# Altium PCB roneCPUBoard-v11.PcbDoc (part 3 of 3)
Units mil, origin at the board's own origin, x right, y up, seen from the top; angles counter-clockwise.
Board outline 3915.41 x 3915.49 mil, 2 copper layers (Top Layer, Bottom Layer); 202 components, 158 nets, 750 pads, 439 vias.
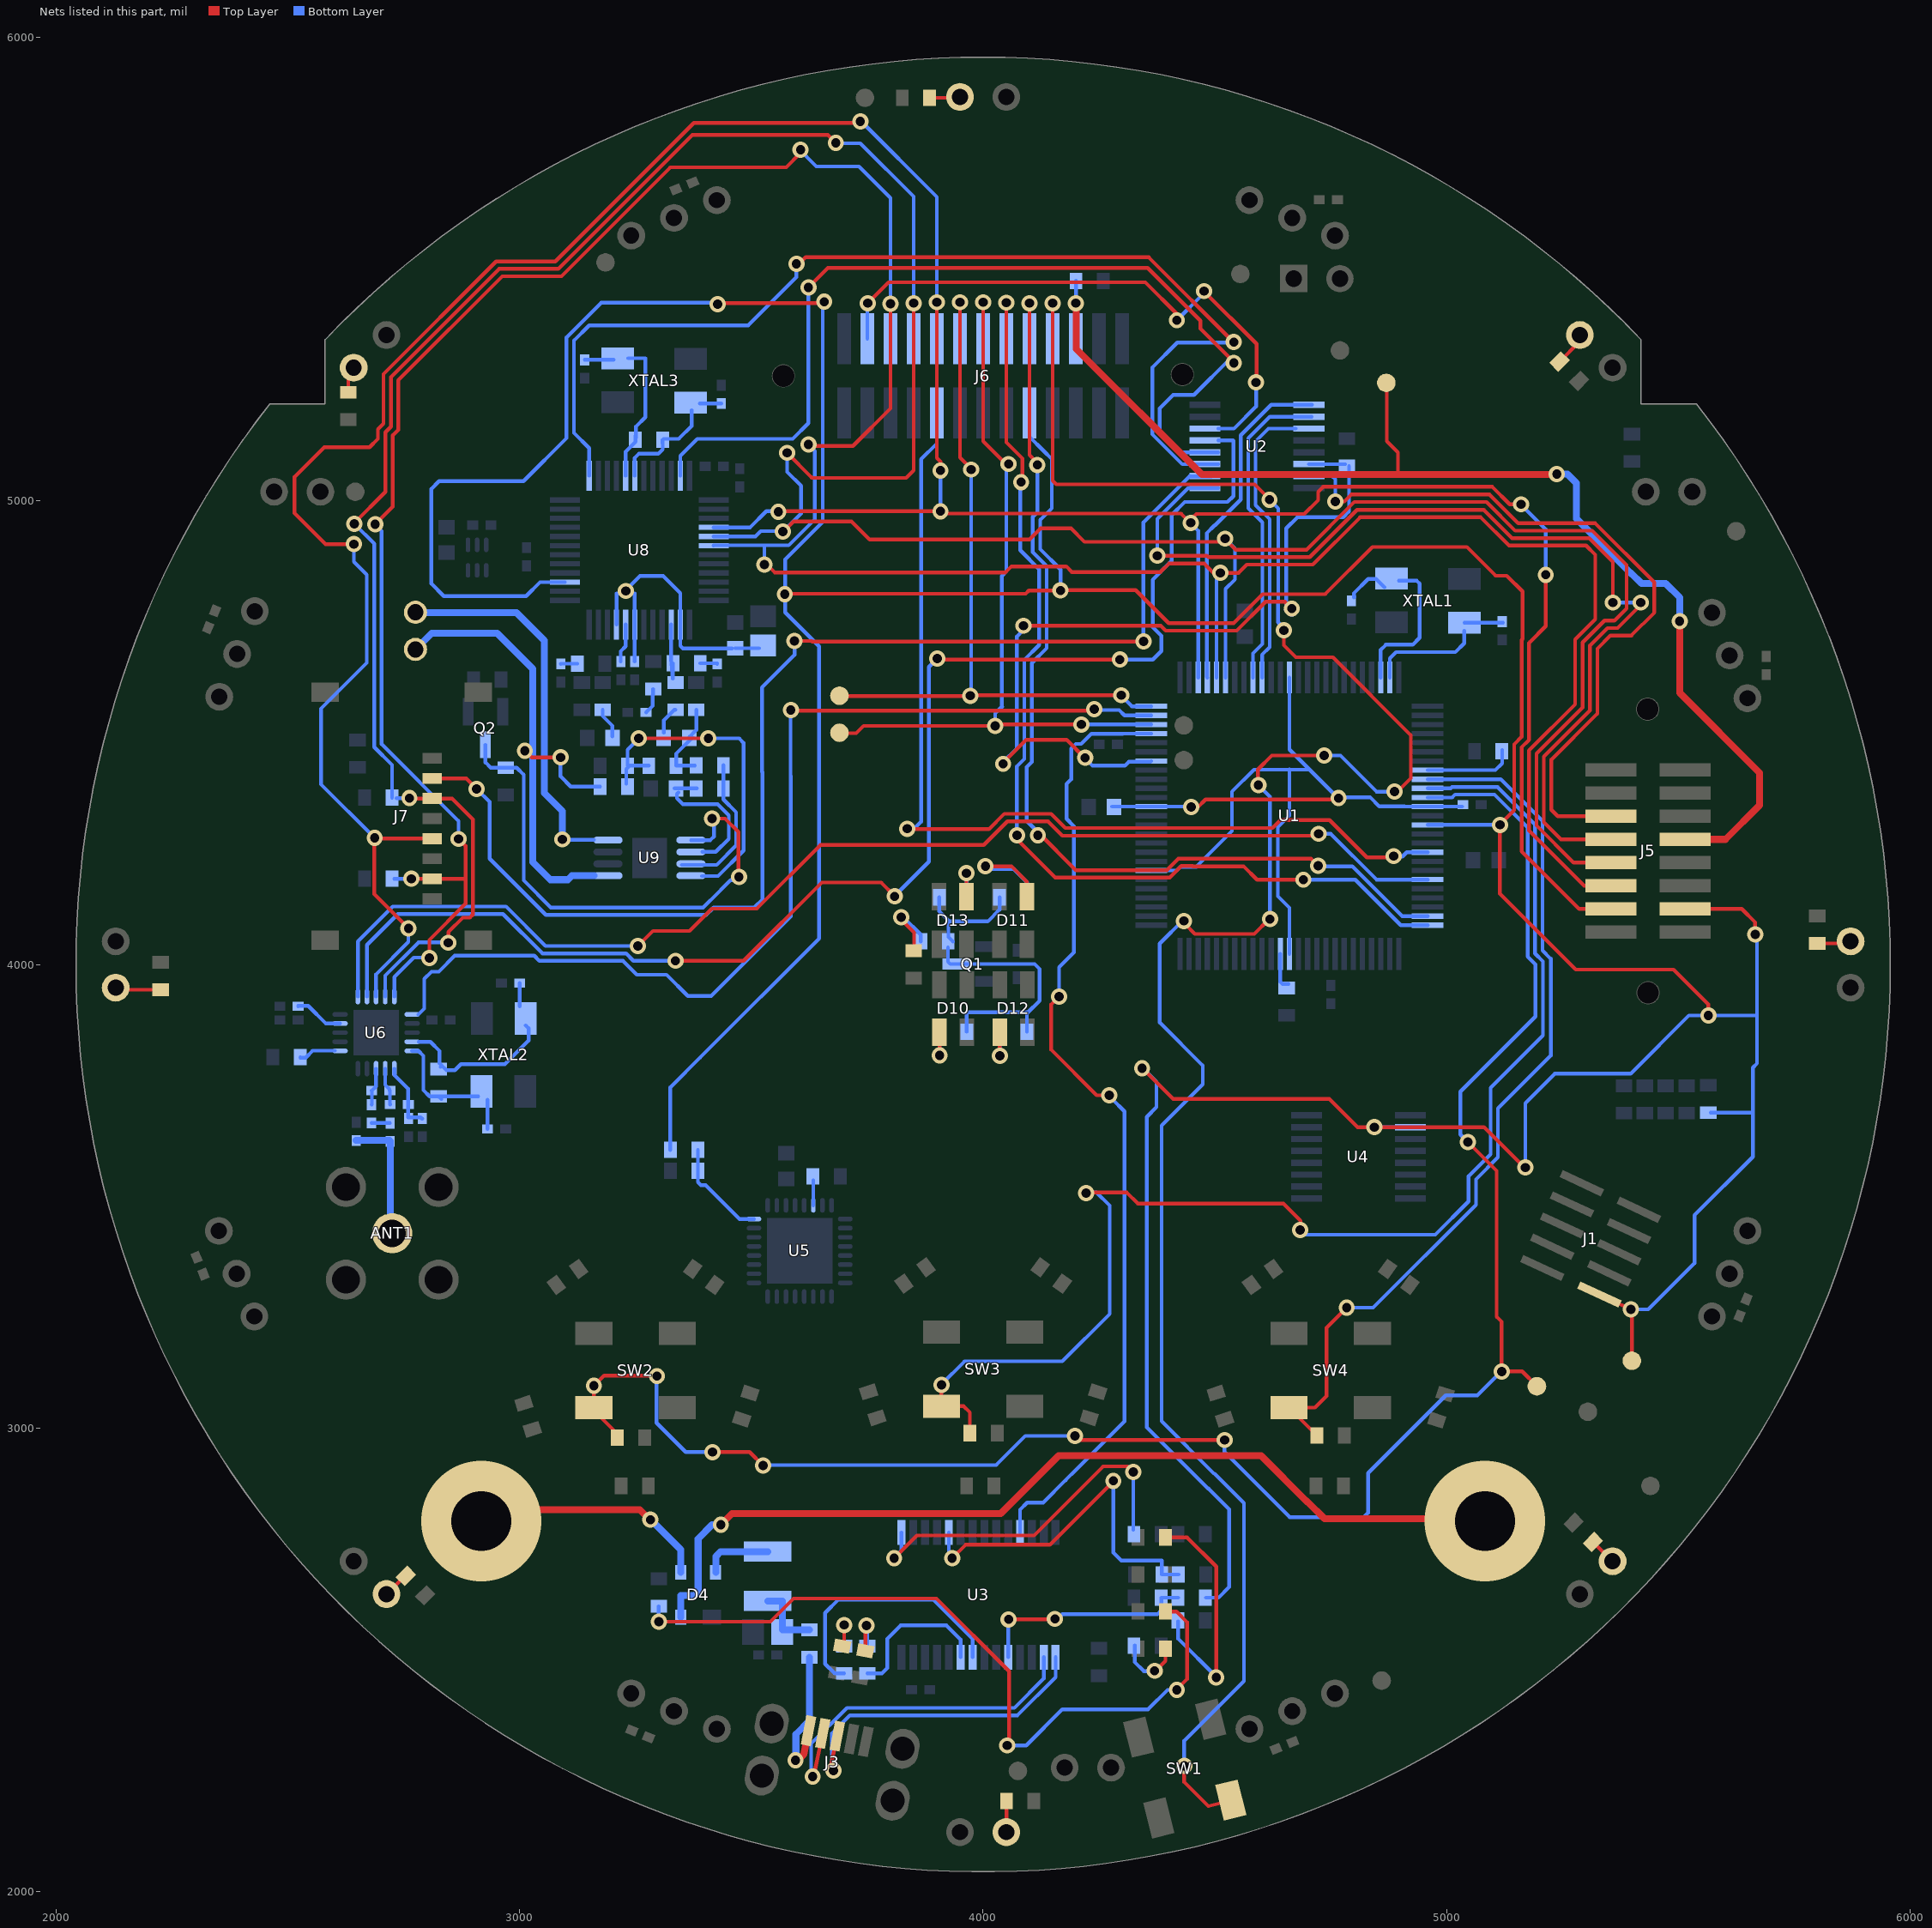
[diagram p3: the nets of this part, all layers, seen from the top]

## Via types
v1: diameter 35, hole 20, Top Layer to Bottom Layer, 418 vias
v2: diameter 25.98, hole 12.99, Top Layer to Bottom Layer, tented top, 17 vias
v3: diameter 149, hole 129, Top Layer to Bottom Layer, 2 vias
v4: diameter 260, hole 129, Top Layer to Bottom Layer, 2 vias

## Nets (pads, with @x,y where several pads share a name; then routed paths per layer and width w, separated by ;. In a path a pad name is that pad's centre, name@x,y a point inside that pad or via, vN(x,y) a via of type N, cw(c..) or ccw(c..) an arc to the next point about the centre after c; other vN are vias at no path point) (continued)
MOT1_PWMB: J6.10 U1.67 | length 2137.8
  Top Layer w8: v1@3836,4292 4012.65,4292 4045.65,4325 4146.63,4325 4177.13,4294.5 4624.5,4294.5 4641.5,4311.5 4747.5,4311.5 4828,4231 4886,4231 4893,4224 4893,4233 4892,4234 v1(4886,4234)
  Bottom Layer w8: v1@3851,4293 3866,4308 3866,5090 3900,5124 J6.10@3900,5189.98 ; v1(4886,4234) 4892,4234 4893,4233 4905,4233 4914.26,4242.26 U1.67@4959.23,4242.26
  other v1: 3836,4293
NetANT1_1: ANT1.1 C22.1 C23.2 | length 277.4
  Bottom Layer w15: C23.2@2647,3620.31 2718.69,3620.31 C22.1@2720.34,3618.66 ; C22.1@2720,3618.32 C22.1@2720.34,3618.66 ; ANT1.1@2721,3416 2721,3420.06 2721,3618 C22.1@2720.34,3618.66
NetC5_2: C5.2 U1.48 XTAL1.1 | length 414.4
  Bottom Layer w8: C5.2@4800,4792 4800,4801 4831,4832 4848,4832 XTAL1.1@4866,4814 ; U1.48@4857.85,4619.23 4857.85,4678.85 4869,4690 4927,4690 4942,4705 4942,4822 4936,4828 XTAL1.1@4897,4828
NetC6_2: C6.2 U1.49 XTAL1.3 | length 325.5
  Bottom Layer w8: U1.49@4877.54,4619.23 4877.54,4660.54 4891,4674 5019,4674 5038,4693 XTAL1.3@5038,4720 ; XTAL1.3@5038.74,4737.26 C6.2@5122,4737.26
NetC21_2: C21.2 U6.19 | length 107.4
  Bottom Layer w8: C21.2@2521.69,3910 2521.69,3911 2543.37,3911 2581.69,3872.69 U6.19@2612.24,3872.69
NetC22_2: C22.2 L2.2 | length 40.6
  Bottom Layer w8: L2.2@2680,3658.31 2720,3658.31 C22.2@2720,3657.69
NetC24_2: C24.2 C25.2 L4.2 U6.11 | length 150.7
  Bottom Layer w8: U6.11@2729.37,3775.24 2729.37,3761.63 2759,3732 L4.2@2759,3698 ; L4.2@2759.69,3698 L4.2@2759,3698 ; C25.2@2790,3667.69 2789,3667 2786,3670 2760,3670 2759,3670 L4.2@2759,3698
NetC26_2: C26.2 R44.1 U6.9 XTAL2.1 | length 390.2
  Bottom Layer w8: U6.9@2782,3833 2807.16,3833 2827,3813.16 2827,3786.53 R44.1@2829,3784.53 ; R44.1@2829,3779 2832,3782 2842,3772 2860,3772 2873,3785 2968,3785 3019,3836 3019,3862.48 XTAL2.1@3012.74,3868.74 ; XTAL2.1@2999.69,3909.69 C26.2@2999.69,3960
NetC27_2: C27.2 R44.2 U6.10 XTAL2.3 | length 298.6
  Bottom Layer w8: U6.10@2767.76,3813.63 2781.37,3813.63 2792,3803 2792,3729 2805.53,3715.47 XTAL2.3@2910.53,3715.47 ; R44.2@2825,3715.47 R44.2@2831,3709.47 ; C27.2@2930.31,3645 XTAL2.3@2930.31,3708.31
NetC38_1: C38.1 R45.2 | length 35.8
  Bottom Layer w8: C38.1@3089,4648.69 3089,4649 R45.2@3124.47,4649
NetC39_1: C39.1 R46.2 | length 37.8
  Bottom Layer w8: R46.2@3389.53,4650 3426,4650 C39.1@3426,4648.69
NetC40_1: C40.1 R47.2 | length 56.8
  Bottom Layer w8: C40.1@3272.69,4544 3287,4558.31 3287,4581 3288,4582 R47.2@3288,4594.47
NetC41_1: C41.1 R48.2 U8.18 XTAL3.1 | length 289.5
  Bottom Layer w8: U8.18@3248.16,5054.43 3248.16,5093.16 3257,5102 3299,5102 3307.5,5110.5 ; R48.2@3308,5125 3308,5132 R48.2@3308.53,5132 ; 3308.53,5111.53 R48.2@3308.53,5132 ; 3371,5167 XTAL3.1@3371,5196 ; 3371,5168 3371,5162 3343,5134 3310.53,5134 R48.2@3308.53,5132 ; XTAL3.1@3388.68,5210.32 C41.1@3435,5210.32
NetC42_2: C42.2 U8.44 | length 84.2
  Bottom Layer w8: C42.2@3218,4653.69 3218,4676 3228.47,4686.47 U8.44@3228.47,4733.57
NetC43_1: C43.1 R48.1 U8.17 XTAL3.3 | length 374.5
  Bottom Layer w8: C43.1@3140,5304.68 XTAL3.3@3202.68,5304.68 ; U8.17@3228.47,5054.43 3228.47,5106.47 3250,5128 R48.1@3250,5141 ; XTAL3.3@3234,5308 3271,5308 3271,5181 3251,5161 R48.1@3251,5137
NetC44_2: C44.2 R49.2 | length 66.2
  Bottom Layer w8: R49.2@3179,4549.47 3179,4536 3200,4515 C44.2@3200,4492
NetC45_2: C45.2 R51.2 | length 61.3
  Bottom Layer w8: C45.2@3311,4500 3311,4527 3333.47,4549.47 R51.2@3336,4549.47
NetC46_2: C46.2 R58.2 U9.2 | length 308.9
  Bottom Layer w8: C46.2@3334,4380 R58.2@3382,4380 ; C46.2@3342.5,4371.5 3339,4368 3339,4359 3352,4346 3427,4346 3451,4322 3451,4271 3423,4243 U9.2@3394,4243
NetD1_2: D1.2 R8.2 | length 528.5
  Top Layer w8: D1.2@4393.53,2764 4440,2764 4503,2701 v1(4503,2462)
  Bottom Layer w8: R8.2@4421,2583 4421,2545 v1@4503,2463
NetD3_2: D3.2 R14.2 | length 103.7
  Top Layer w8: D3.2@3746,2519 3746,2577 v1@3749,2574
  Bottom Layer w8: R14.2@3750,2529.53 v1@3750,2571
  other v1: 3748,2574
NetD4_4: D4.4 R13.1 | length 151
  Bottom Layer w15: D4.4@3423,2688.23 3423,2723 3433.15,2733.15 R13.1@3535,2733.15
NetD5_2: D5.2 R15.2 | length 93.1
  Top Layer w8: D5.2@3696,2529 3700,2533 v1(3700,2575)
  Bottom Layer w8: R15.2@3700,2529.53 v1(3700,2575)
NetD6_2: D6.2 R17.2 | length 1668.9
  Top Layer w8: v1(3300,2582) 3300,2579 3303,2582 3540.96,2582 3590.96,2632 3899,2632 4056,2475 4056,2318 4053,2315 v1(4052,2315) ; D6.2@4393.53,2604 4417,2604 4440,2581 4440,2458 4417.5,2435.5 v1(4418,2435)
  Bottom Layer w8: v1(3300,2582) R17.2@3300,2615.47 ; v1(4052,2315) 4093,2315 4171,2393 4356,2393 4398,2435 v1(4418,2435)
NetD7_2: D7.2 R16.2 U3.19 | length 488.1
  Top Layer w8: v1(4055,2587) 4156,2587 4157,2588 v1(4155,2588)
  Bottom Layer w8: U3.19@4053.98,2505.55 4053.98,2585.98 v1(4055,2587) ; v1(4155,2588) 4157,2588 4159,2590 4161,2588 4171,2598 4376,2598 4384.53,2606.53 R16.2@4384.53,2634 ; R16.2@4385,2634 D7.2@4420.47,2634
NetD8_2: D8.2 R18.2 | length 144.8
  Top Layer w8: v1@4373,2477 4393.53,2497.53 D8.2@4393.53,2524
  Bottom Layer w8: R18.2@4327,2531 4327,2495 4347,2475 v1@4372,2475
  other v1: 4370,2476
NetD9_2: D9.2 R19.2 | length 155.7
  Top Layer w8: v1@3823,4103 3823,4097 3851,4069 D9.2@3851,4032
  Bottom Layer w8: v1@3822,4101 3829,4101 3865.47,4064.53 R19.2@3865.47,4050
  other v1: 3823,4102
NetD10_3: D10.3 R20.2 | length 125.2
  Top Layer w8: v1@3905.94,3796.06 D10.3@3905.94,3853.82
  Bottom Layer w8: R20.2@3905.47,3855 3905.47,3796.06 3906,3796.06 v1(3906,3804)
NetD11_3: D11.3 R21.2 | length 280
  Top Layer w8: v1@4002,4213 4009,4206 4015,4212 4061,4212 4094.06,4178.94 D11.3@4094.06,4146.18
  Bottom Layer w8: v1@4005,4211 4010,4206 4066,4206 4095,4177 R21.2@4095,4147 ; R21.2@4094.06,4146.94 4094.1,4146.78 R21.2@4094.53,4145
  other v1: 4005,4212
NetD12_3: D12.3 R22.2 | length 131
  Top Layer w8: v1@4035.94,3796.06 D12.3@4035.94,3853.82
  Bottom Layer w8: R22.2@4035.47,3855 4035.47,3792.47 4036,3793 v1(4036,3803)
NetD13_3: D13.3 R23.2 | length 110.9
  Top Layer w8: D13.3@3964.06,4146.18 v1@3964.06,4193.94
  Bottom Layer w8: v1(3964,4197) 3964,4201.94 3964.53,4202.47 R23.2@3964.53,4145
NetD30_2: D30.2 R11.2 U3.5 | length 811.3
  Top Layer w8: v1(3933.02,2718.98) 3962,2748 4144,2748 4281,2885 v1(4281,2886)
  Bottom Layer w8: U3.5@3926.02,2774.45 3926.02,2718.98 v1(3933.02,2718.98) ; v1(4281,2886) 4281,2731 4298,2714 4385.53,2714 R11.2@4385.53,2684 ; R11.2@4387,2684 D30.2@4421.47,2684
NetD31_1: D31.1 U3.1 | length 772.7
  Top Layer w8: v1(3808,2719) 3857,2768 4110,2768 4259,2917 v1@4312,2917
  Bottom Layer w8: v1@3807.5,2719.5 3823.66,2735.66 U3.1@3823.66,2774.45 ; D31.1@4324,2780 v1(4324,2905)
NetJ3_1: J3.1 R62.1 | length 299.4
  Top Layer w15: v1@3601,2284 3613,2296 J3.1@3623.14,2346.91
  Bottom Layer w15: v1@3596,2287 3596,2339.04 3625,2368.04 R62.1@3625,2505.47
  other v1: 3595,2283
NetJ8_1: J8.1 R53.1 U9.5 | length 1088.2
  Top Layer w8: v1(3011,4461) 3011,4462 3026,4447 v1(3088,4447)
  Bottom Layer w8: v1(3088,4447) 3088,4406 3110,4384 R53.1@3173.47,4384
  Bottom Layer w15: J8.1@2775,4680 2810,4715 2951,4715 3028,4638 3028,4221 3066,4183 3103.67,4183 3112.67,4192 U9.5@3160.51,4192
NetJ8_2: J8.2 U9.8 | length 803.5
  Bottom Layer w8: v1@3090.49,4269 U9.8@3160,4269
  Bottom Layer w15: J8.2@2775,4760 2775,4759 2993,4759 3053,4699 3053,4370 3092,4331 v1@3092,4285
  other v1: 3092,4270
NetL1_1: L1.1 R13.2 R62.2 | length 149.3
  Bottom Layer w15: R13.2@3535,2626.85 3566.5,2626.85 L1.1@3566.5,2565 ; L1.1@3569,2564.53 R62.2@3625,2564.53
NetL2_1: L2.1 L3.2 U6.13 | length 83
  Bottom Layer w8: L2.1@2680,3697.69 2681,3697.69 L3.2@2681,3728 ; L3.2@2680.31,3728 L3.2@2681,3728 ; U6.13@2690,3775.24 2690,3737 L3.2@2681,3728
NetL3_1: L3.1 L4.1 U6.12 | length 81.9
  Bottom Layer w8: U6.12@2709.68,3775.24 2709.68,3740.32 2719,3731 2719,3728 L3.1@2719.68,3728 2719.68,3700.32 L4.1@2720.31,3698
NetQ1_3: Q1.3 R19.1 R20.1 R21.1 R22.1 R23.1 | length 813.1
  Bottom Layer w8: R23.1@3905.47,4145 3905,4145 3905,4115 3925,4095 ; R19.1@3924,4037 3924,4006 3929,4001 Q1.3@3941.57,4001 4111,4001 4122,3990 4122,3922 4095,3895 ; R19.1@3934.53,4050 3925,4059.53 3925,4095 ; R20.1@3964.53,3855 3964.53,3897 4094.53,3897 R22.1@4094.53,3855 ; R21.1@4035.47,4145 4035.47,4118.47 4010,4093 3925,4093 3925,4095
NetQ2_3: Q2.3 R56.1 U9.1 | length 1130.2
  Top Layer w8: v1(3415,4315) 3443,4315 3472,4286 v1@3472,4189
  Bottom Layer w8: Q2.3@2926,4474 2926,4436 2937.47,4424.53 R56.1@2970,4424.53 2993.47,4424.53 3008.5,4409.5 3008.5,4181.5 3067,4123 3395.65,4123 3411.65,4139 3412,4139 3455,4182 3473,4182 v1(3473,4189) ; U9.1@3369.57,4268.39 3411.39,4268.39 3419,4276 v1@3419,4308
NetR1_2: R1.2 U1.89 | length 79.7
  Bottom Layer w8: U1.89@4641.31,4022.77 4641.32,3962.68 4646,3958 R1.2@4659,3958
NetR9_1: R9.1 U1.58 | length 195.8
  Bottom Layer w8: U1.58@4959.23,4419.43 5105.43,4419.43 5120,4434 R9.1@5120,4463
NetR14_1: R14.1 U3.23 | length 331.9
  Bottom Layer w8: R14.1@3750,2470.47 3781.47,2470.47 3793,2482 3793,2545 3822,2574 3921,2574 3951.61,2543.39 U3.23@3951.61,2505.55
NetR15_1: R15.1 U3.22 | length 564.4
  Bottom Layer w8: R15.1@3700,2470.47 3679.53,2470.47 3659,2491 3659,2601 3688,2630 3892.2,2630 3977.2,2545 U3.22@3977.2,2505.55
NetR24_1: R24.1 T1.1 | length 76.5
  Top Layer w8: R24.1@3884.53,5870 3950,5870 T1.1@3961,5870
NetR25_1: R25.1 T2.1 | length 42.5
  Top Layer w8: R25.1@2630,5234.53 T2.1@2630,5277
NetR26_1: R26.1 T3.1 | length 82.5
  Top Layer w8: T3.1@2142.53,3945.47 R26.1@2225,3945.47
NetR27_1: R27.1 T4.1 | length 51.1
  Top Layer w8: T4.1@2714.88,2642.88 R27.1@2751,2679
NetR28_1: R28.1 T5.1 | length 85.9
  Top Layer w8: T5.1@4050,2128 4048.26,2129.16 4047,2130 T5.1@4050.47,2133.47 ; T5.1@4050.47,2132.47 T5.1@4050.47,2133.47 ; R28.1@4050.47,2195 T5.1@4050.47,2133.47 ; T5.1@4061,2144 T5.1@4050.47,2133.47
NetR29_1: R29.1 T6.1 | length 59.6
  Top Layer w8: R29.1@5315.88,2754.12 T6.1@5358,2712
NetR30_1: R30.1 T7.1 | length 62.5
  Top Layer w8: R30.1@5800,4045.47 T7.1@5862.47,4045.47
NetR31_1: R31.1 T8.1 | length 60.6
  Top Layer w8: R31.1@5244.12,5300.88 T8.1@5287,5343.76
NetR33_2: R33.2 U5.30 | length 54.1
  Bottom Layer w8: U5.30@3633.53,3480.43 R33.2@3633.53,3534.53
NetR43_2: R43.2 U6.16 | length 81.7
  Bottom Layer w8: R43.2@2526.53,3800 2526.53,3799 2538,3799 2553,3814 U6.16@2601,3814
NetR50_2: R50.2 R52.2 R53.2 U9.4 | length 731
  Top Layer w8: v1(3257,4488) v1@3410,4488
  Bottom Layer w8: R53.2@3230,4390 3230,4422 3237,4429 R52.2@3278.47,4429 ; R50.2@3232.53,4429 3232.53,4463.53 v1(3257,4488) ; U9.4@3393,4191 3428,4191 3483,4246 3483,4478 3474,4487 3474,4488 v1(3407,4488)
NetR58_1: R58.1 R59.2 U9.3 | length 316.8
  Bottom Layer w8: U9.3@3349.49,4215 3425,4215 3467,4257 3467,4328.63 3439.53,4356.1 R58.1@3439.53,4380 ; R58.1@3439.53,4382.53 R59.2@3439.53,4430
NetR63_1: R63.1 R64.1 U5.24 | length 234.5
  Bottom Layer w8: R64.1@3384.53,3568.53 R64.1@3384.53,3557.53 ; R63.1@3384.53,3600 R64.1@3384.53,3557.53 ; U5.24@3505.57,3450.9 3474.1,3450.9 3401,3524 3391,3524 3384.53,3530.47 R64.1@3384.53,3555 R64.1@3384.53,3557.53
POWER_BUTTON: J6.19 SW1.3 | length 4864.4
  Top Layer w8: v1(4150,5427) 4150,5044 4158,5036 4586,5036 v1@4623,4999 ; v1(4434,2271) 4434,2236 4486,2184 SW1.3@4534,2196 ; v1@4437,4086 4457,4066 4585,4066 v1@4617,4098 ; v1(4594,4387) 4593,4387 4593,4421 4623,4451 v1(4736,4451) ; v1@4650,4713 4656,4713 4649,4706 4649,4689 4675,4663 4754.75,4663 4923,4494.75 4923,4402 4895,4374 v1@4881,4374
  Bottom Layer w8: J6.19@4150,5350.02 v1(4150,5427) ; v1@4432.5,4096.5 4381,4045 4381,3875 4474,3782 4474,3741.63 4385,3652.63 4385,3014.75 4498.25,2901.5 4499.47,2901.5 4563,2837.97 4563,2454 4434,2325 v1(4434,2271) ; v1(4594,4387) 4619,4362 v1@4619,4100 ; v1(4618,5003) 4637,4984 4637,4780.72 4636.5,4780.22 4636.5,4738.5 v1@4654,4721 ; v1(4736,4451) 4771,4451 4849,4373 v1(4888,4373)
  other v1: 4433,4094 4619,4098 4649,4721
PRONG1: D4.2 | length 1983.2
  Top Layer w15: v1(3434,2791) 3458,2815 4038,2815 4163,2940 4600.06,2940 4698.27,2841.78 4699.22,2841.78 4737,2804 5003,2804 v4@5026,2827
  Bottom Layer w15: D4.2@3347.6,2591.77 3347.6,2638.6 3377.4,2638.6 3385,2646.2 3385,2761 3415,2791 v1(3434,2791)
  other v4: 5083,2799
PRONG2: D4.3 | length 476
  Top Layer w15: v4@2960,2830 2966,2824 3259,2824 v1@3281,2802
  Bottom Layer w15: v1@3281,2804 3347.6,2737.4 D4.3@3347.6,2688.23
  other v1: 3282,2802
  other v4: 2917,2799
QEI_0A: J6.11 TP16.1 U1.25 | length 1620.2
  Top Layer w8: TP16.1@3699,4579 3972,4579 3974,4581 v1(4298,4581) ; v1@3950,5430 3950,5094 3974,5070 v1@3973,5069
  Bottom Layer w8: J6.11@3950,5350.02 v1@3950,5430 ; v1@3974,4581 v1(3974,5068) ; v1(4298,4581) 4295,4583 4320.78,4557.22 U1.25@4362.77,4557.22
  other v1: 3972,4580 3950,5429
QEI_0B: J6.13 TP17.1 U1.23 | length 1698.3
  Top Layer w8: TP17.1@3690,4499 3726,4499 3742,4515 v1(4026,4515) v1@4020,4515 ; v1(4000,5429) 4000,5129 v1@4049,5080 ; v1@4030,4518 v1(4212,4518)
  Bottom Layer w8: J6.13@4000,5350.02 v1(4000,5429) ; v1@4026,4519 4026,4542 4039,4555 ; 4041,4556 4040.5,4556.5 4040.5,4838.5 4050,4848 v1@4050,5080 ; v1@4213,4518 4296.85,4518 4297,4517.85 U1.23@4362.77,4517.85
  other v1: 4055,5080
QEI_1A: J6.15 U1.75 | length 2276
  Top Layer w8: v1(4050,5428) 4050,5126.72 4085,5091.72 4085,5055 v1@4079,5049 ; v1@4073,4288 4072,4288 4069,4285 4069,4274 4155.5,4187.5 4402.78,4187.5 4427.78,4212.5 4452.22,4212.5 4452.72,4212 4562,4212 4591,4183 v1(4691,4183)
  Bottom Layer w8: J6.15@4050,5350.02 v1(4050,5428) ; v1@4069,4285 4073,4289 4073,4427.63 4089,4443.63 4089,4657.2 4121,4689.2 4121,4853 4080,4894 v1@4080,5038 ; v1@4072,4288 v1@4073,4288 ; v1@4687,4183 v1(4691,4183) 4803.12,4183 4901.34,4084.78 U1.75@4959.23,4084.78
  other v1: 4073,4279 4082,5041
QEI_1B: J6.17 U1.74 | length 2222.3
  Top Layer w8: v1(4100,5427) 4100,5099.35 4114,5085.35 4114,5077 v1@4116,5075 ; v1(4118,4279) 4118,4285.75 4200.25,4203.5 4396.15,4203.5 4421.15,4228.5 4707.5,4228.5 v1(4723,4213)
  Bottom Layer w8: J6.17@4100,5350.02 v1(4100,5427) ; v1(4117,5078) 4117,4976 4107,4966 4107,4889.63 4137,4859.63 4137,4682.58 4105,4650.58 4105,4437 4094,4426 4094,4309.75 4118,4285.75 v1(4118,4279) ; v1@4723,4212 4796.75,4212 4904.28,4104.46 U1.74@4959.23,4104.46
RADIO_CE: U1.70 U6.1 | length 2668.2
  Top Layer w8: v1(3255,4040) 3287.5,4072.5 3366.5,4072.5 3414.5,4120.5 3511.5,4120.5 3649,4258 4001.28,4258 4052.28,4309 4140,4309 4171,4278 4711,4278 4714,4281 v1@4723,4272
  Bottom Layer w8: U6.1@2650.63,3930.76 2650.63,4049.63 2726,4125 2970.49,4125 3055.49,4040 v1(3255,4040) ; v1@4723,4272 4733,4282 4750,4282 4848.8,4183.2 U1.70@4959.23,4183.2
  other v1: 4724,4282
RADIO_IRQ: U1.24 U6.6 | length 2232
  Top Layer w8: v1(3585,4549) 3586,4548 4237,4548 v1(4240,4551)
  Bottom Layer w8: U6.6@2781,3892 2794,3905 2794,3969 2809.5,3984.5 2825.22,3984.5 2859.72,4019 3031.24,4019 3042.24,4008 3222.65,4008 3252.65,3978 3316.72,3978 3362.72,3932 3413,3932 3585,4104 3585,4407.28 3584.5,4407.78 3584.5,4548.5 v1(3585,4549) ; v1@4239,4549 4293.54,4549 4305,4537.54 U1.24@4362.77,4537.54
RESET: D7.1 J1.10 J5.3 J6.18 R60.1 R63.2 TP4.1 U1.64 U4.10 U8.3 | length 11644.6
  Top Layer w8: v1@3431,5427 v1@3657,5427 ; v1@3580,4800 4067.28,4800 4091.72,4800 4098.72,4807 v1(4167,4807) ; v1@4174,4808 4329,4808 4400.5,4736.5 4540.5,4736.5 4603,4799 4738,4799 4840,4901 5044,4901 5106,4839 5130,4839 5164,4805 5164,4702.25 5162,4700.25 5162,4491.14 5146,4475.14 5146,4333 v1@5115,4302 ; v1@4343.5,3776.5 4410,3710 4747,3710 4808,3649 v1(4844,3649) 5081,3649 v1@5168,3562 ; v1@5115,4301 5115,4153 5279,3989 5490,3989 5565,3914 v1(5565,3890) ; J1.10@5330.13,3287.87 v1(5398,3256) ; TP4.1@5400,3145 v1@5400,3253 ; J5.3@5538,4120 5637,4120 5666,4091 v1@5666,4066
  Bottom Layer w8: U8.3@3097.57,4825.1 3043.73,4825.1 3013.63,4795 2836,4795 2809,4822 2809,5026 2826,5043 3008,5043 3101,5136 3101,5353 3176,5428 v1@3427,5428 ; R63.2@3325,3600 3325,3735 3392,3802 ; 3390,3800 3392,3802 ; v1@3654,5425 3654,4955 3573,4874 3573,4759.72 3646,4686.72 3646,4056 3392,3802 ; J6.18@4100,5189.98 4100,5139 4130.22,5108.78 4130.22,5108.5 4148,5090.72 4148,4984.37 4123,4959.37 4123,4896.25 4167,4852.25 v1@4167,4819 ; v1@4344,3777 4374,3747 4374,3692.25 4353,3671.25 4353,3001.49 4484.99,2869.5 4486.22,2869.5 4531,2824.72 4531,2657 4508,2634 D7.1@4481,2634 ; v1@4834,3648.98 U4.10@4922.2,3648.98 ; U4.10@4893.66,3648.98 U4.10@4947.02,3648.98 ; U1.64@4959.23,4301.31 v1(5115.31,4301.31) ; v1@5170,3564 5170,3700.72 5233.59,3764.31 5397.31,3764.31 5523,3890 v1(5565,3890) ; v1(5398,3256) 5435.37,3256 5535,3355.63 5535,3459 5661,3585 5661,3680.47 ; v1@5566,3890 5670,3890 ; R60.1@5570,3680.47 5661,3680.47 ; v1@5668.5,4062.5 5669,4062 5664,4057 5670,4051 5670,3890 ; 5661,3680.47 5661,3777.56 5670,3786.56 5670,3890
  other v1: 5170,3562 4343,3776 5666,4065 3572,4799 3427,5425 3657,5430
RIGHT: R46.1 R51.1 U8.39 | length 150.7
  Bottom Layer w8: U8.39@3326.9,4733.57 3326.9,4655.1 3327.4,4649.72 3330.47,4616.53 R46.1@3330.47,4650
RIGHT_OUT: C45.1 R52.1 R55.2 R59.1 | length 182.9
  Bottom Layer w8: C45.1@3366,4489 3366,4491 3381,4506 R55.2@3381,4549.47 ; C45.1@3373,4490 3337.53,4454.53 R52.1@3337.53,4429 R59.1@3378,4429
SPI_CLK: J5.4 J6.9 J7.5 U1.28 U6.3 U8.28 | length 7305.8
  Top Layer w8: v1@2643.5,4908.5 v1(2642,4907) ; v1@2645,4907 v1(2642,4907) ; v1(2760,4078) 2686,4152 2686,4271 2687,4272 2809,4272 2808.57,4271.57 J7.5@2811.02,4271.57 ; v1@3558,4978 v1(3908,4978) ; v1@3732.72,5816 3375.75,5816 3076.75,5517 2949,5517 2706,5274 2706,5166.97 2694,5154.97 2694,5134.25 2676,5116.25 2578.25,5116.25 2514,5052 2514,4974 2581,4907 v1(2642,4907) ; v1(3900,5429) 3900,5093 3908,5085 v1(3908,5066) ; v1@3920,4977 3924,4973 4427,4973 v1@4448,4952 ; v1@4454,4966 4460,4972 4693,4972 4723,5002 4723,5020 4733.66,5030.66 5098.73,5030.66 5136.39,4993 v1@5159.5,4993 ; v1(5214,4841) 5214,4730 5180,4696 5180,4695.63 5178,4693.63 5178,4484.51 5162,4468.51 5162,4244 5286,4120 J5.4@5354.98,4120
  Bottom Layer w8: v1(2642,4907) 2642,4869 2670,4841 2670,4651 2571,4552 2571,4389 v1(2687,4273) v1@2688,4272 ; U6.3@2690,3930.76 2690,3979 2759.75,4048.75 v1@2759.75,4078 ; U8.28@3418.43,4943.21 3497.21,4943.21 3532,4978 v1@3569,4978 ; v1@3737.5,5818.5 3900,5656 v1(3900,5429) J6.9@3900,5350.02 ; v1(3908,4978) v1@3919,4978 ; v1(3908,5066) 3908,4989 v1@3919,4978 ; v1@3920,4977 v1@3919,4978 ; v1@4447,4953 4464,4936 4464,4737.7 ; U1.28@4464.15,4619.23 4464.15,4736.85 ; v1@5161,4992 5214,4939 v1(5214,4841)
  other v1: 4448,4953 3558,4977 5161,4993 3735,5819
SPI_MISO: J5.6 J6.5 J7.7 R2.2 U1.30 U6.5 U8.30 | length 7181.2
  Top Layer w8: v1(2688,4950) 2726,4988 2726,5141.72 2738,5153.72 2738,5260.75 2962.25,5485 3090,5485 3325,5720 3575,5720 3605,5750 v1@3605,5758 ; v1(2766,4185) 2883,4185 ; v1(2805,4014) 2805,4053 2883,4131 2883,4185 ; v1(2868,4271) 2883,4256 2883,4185 ; v1(3528,4863) 3533,4863 3550,4846 4048,4846 4061,4859 4091.72,4859 4179.35,4859 4191.35,4847 4382.72,4847 4400.72,4865 4477.37,4865 4479.37,4863 4479.37,4862.63 4500,4842 4512,4842 4513,4843 4514,4843 4516,4845 4551,4845 4569,4863 4711.49,4863 4813.49,4965 5073.88,4965 5134.88,4904 5301.12,4904 5321,4884.12 5321,4744.88 5277.5,4701.38 5277.5,4561.38 5178,4461.88 5178,4289 5297,4170 J5.6@5354.98,4170 ; v1@3622,5121 3624,5119 3719,5119 3800,5200 v1(3800,5426)
  Bottom Layer w8: v1@2688,4949 2702,4935 2702,4475.63 2868,4309.63 v1(2868,4271) ; R2.2@2729,4185 v1(2766,4185) ; U6.5@2729.37,3930.76 2729.37,3973.12 2771.25,4015 v1@2803,4015 ; v1@2804,4013 v1(2805,4014) ; U8.30@3418.43,4903.84 3419.09,4904.5 3580.5,4904.5 3637,4961 3637,5108 v1(3623,5122) ; v1(3528,4863) 3528,4904 ; 3618,5744 3640,5722 3732,5722 3800,5654 v1(3800,5426) J6.5@3800,5350.02 ; U1.30@4503.52,4619.23 4503.52,4832.52 4514,4843 v1(4512,4845)
  other v1: 3606,5758
SPI_MOSI: J5.8 J6.7 J7.3 R3.2 U1.31 U6.4 U8.29 | length 7541.7
  Top Layer w8: v1@2642,4952 2710,5020 2710,5148.35 2722,5160.35 2722,5267.37 2955.63,5501 3083.37,5501 3372.37,5790 3665,5790 v1(3682,5773) v1@3683,5772 ; v1(2762,4359) 2758,4359 2757.19,4358.19 J7.3@2811.02,4358.19 ; J7.3@2812,4358 2854,4358 2899,4313 2899,4108 2892.18,4101.18 2877.18,4101.18 2846,4070 v1(2846,4047) ; v1@3575.86,4940.86 3591,4956 3716,4956 3755,4917 4100,4917 4124,4941 4189.72,4941 4218.72,4912 4520,4912 4521,4911 v1@4525,4915 ; v1@3576,5105 v1(3577,5104) 3630,5051 ; 3630,5050 3834,5050 3850,5066 v1(3850,5427) ; v1@4521,4919 v1@4525,4915 ; v1@4528.5,4918.5 v1@4525,4915 ; J5.8@5354.98,4220 5274,4220 5194,4300 5194,4455.25 5293.5,4554.75 5293.5,4694.75 5340.75,4742 5362.37,4742 5388.5,4768.13 5388.5,4861.87 5314.37,4936 5148.14,4936 5086.14,4998 4801,4998 4698,4895 4545,4895 v1@4525,4915
  Bottom Layer w8: v1(2643,4951) 2686,4908 2686,4469 2724.53,4430.47 R3.2@2724.53,4360 ; U6.4@2709.68,3930.76 2709.68,3976.06 2781.63,4048 2838,4048 2841,4045 v1@2844,4048 ; R3.2@2734,4359 v1@2758,4359 ; v1@2757,4358 v1@2758,4359 ; v1(2762,4359) v1@2758,4359 ; U8.29@3418.43,4923.53 3508.53,4923.53 3520,4935 v1@3568,4935 ; v1@3569,4935 3607,4973 3607,5033 3577,5063 v1(3577,5104) v1@3577,5105 ; v1@3685,5772 3735,5772 3850,5657 v1(3850,5427) J6.7@3850,5350.02 ; v1@4521,4920 v1(4522,4919) 4543.5,4897.5 4543.5,4830.78 4523.2,4810.48 U1.31@4523.2,4619.23
  other v1: 3568,4934
SPI_SEL_A: U1.29 U2.1 | length 734.9
  Bottom Layer w8: U1.29@4483.83,4619.23 4482.5,4620.56 4482.5,4930.5 4499.5,4947.5 4500.22,4947.5 4556,5003.28 4556,5142 4621.57,5207.57 U2.1@4709.57,5207.57
SPI_SEL_AUDIO_SCI: U2.12 U8.23 | length 2067
  Top Layer w8: v1(3623,5461) 3665,5503 4355,5503 4469,5389 4469,5372 4541,5300 v1(4541,5298)
  Bottom Layer w8: U8.23@3346.58,5054.43 3346.58,5097.58 3383,5134 3589,5134 3623,5168 v1(3623,5461) ; U2.12@4507.34,5105.2 4426.8,5105.2 4381,5151 4381,5200 4410,5229 4455,5229 v1@4533,5307 ; v1(4541,5298) v1@4542,5301
SPI_SEL_AUDIO_SDI: U2.11 U8.13 | length 2414.8
  Top Layer w8: v1@3597,5513 3604,5513 3617,5526 4358,5526 ; 4356.5,5526.5 v1@4541,5342
  Bottom Layer w8: U8.13@3149.73,5054.43 3149.73,5114.27 3117,5147 3117,5346.37 3149.63,5379 3493,5379 3597,5483 v1@3597,5511 ; U2.11@4507.34,5079.61 4429.76,5079.61 4365,5144.37 4365,5288 4419,5342 4526,5342 4534,5350 v1(4541,5343)
  other v1: 3597,5512
SPI_SEL_B: U1.34 U2.2 | length 693.5
  Bottom Layer w8: U1.34@4582.26,4619.23 4582.26,4671.26 4602.5,4691.5 4602.5,4954.15 4572,4984.65 4572,5135.37 4618.6,5181.98 U2.2@4709,5181.98
SPI_SEL_C: U1.35 U2.3 | length 627.1
  Bottom Layer w8: U1.35@4601.94,4619.23 4601.94,4668.32 4618.5,4684.87 4618.5,4960.78 4588,4991.28 4588,5128.75 4615.64,5156.39 U2.3@4674.66,5156.39
SPI_SEL_EXPAND0: J5.10 U2.9 | length 2200.1
  Top Layer w8: v1@4376,4883 4380,4887 4385,4882 4483,4882 4486,4879 4704.86,4879 4806.86,4981 5080.51,4981 5141.51,4920 5307.75,4920 5359,4868.75 v1@5359,4779 ; J5.10@5354.98,4270 5247,4270 5210,4307 5210,4448.63 5309.5,4548.13 5309.5,4688.13 5347.37,4726 5369,4726 5418,4775 5419,4775 v1(5419,4781)
  Bottom Layer w8: v1(4376,4882) 4376,4961.37 4443.06,5028.43 U2.9@4507.34,5028.43 ; v1@5358,4781 v1(5419,4781)
  other v1: 5359,4781
SPI_SEL_EXPAND1: J5.12 U2.7 | length 1652.3
  Top Layer w8: v1(4760,4999) 4779.37,4999 4794.37,5014 5092.76,5014 5154.76,4952 5321,4952 5448.5,4824.5 5448.5,4759.5 5399,4710 5354,4710 5325.5,4681.5 5325.5,4541.5 5226,4442 5226,4334 5240,4320 J5.12@5354.98,4320
  Bottom Layer w8: U2.7@4674.66,5054.02 4752.98,5054.02 4760,5047 v1@4760,5000
SPI_SEL_MSP430: J6.3 U2.14 | length 1288.8
  Top Layer w8: v1(3751,5427) 3796,5472 4350,5472 4419,5403 v1@4419,5387 ; v1@4476,5453 4590,5339 v1@4590,5256
  Bottom Layer w8: J6.3@3750,5350.02 v1@3750,5428 ; v1(4418,5390) v1@4476,5448 ; U2.14@4507.34,5156.39 4541.39,5156.39 4589,5204 v1(4589,5256)
  other v1: 4477,5453
SPI_SEL_OE: R10.2 U1.19 U2.6 | length 1828.2
  Top Layer w8: v1(4043,4433) 4043,4435 4093,4485 4180,4485 v1@4220,4445 ; v1@4090,4731 4383.37,4731 4393.87,4720.5 4547.13,4720.5 4609.63,4783 4651,4783 4661,4773 v1@4661,4759
  Bottom Layer w8: v1(4043,4433) 4043,4437 4073,4467 4073,4708 4087,4722 v1@4087,4724 ; v1@4219,4446 4236,4429 4306,4429 4314.33,4437.33 4360.99,4437.33 U1.19@4362.77,4439.11 ; v1@4669,4755 4663,4755 4653,4765 4660,4772 4654,4778 4654,4941 4678,4965 4777,4965 4789.5,4977.5 R10.2@4789.5,5075.5 ; U2.6@4703.2,5079.61 R10.2@4781.39,5079.61
  other v1: 4220,4446 4087,4731 4666,4768
SPI_SEL_RADIO: U2.13 U6.2 | length 3050.6
  Top Layer w8: v1(3336,4008) 3483,4008 3652,4177 3780,4177 v1@3809,4148 ; v1@3905,4658 v1(4295,4658)
  Bottom Layer w8: U6.2@2670.31,3930.76 2670.31,4042.31 2737,4109 2963.86,4109 3048.86,4024 3229.28,4024 3245.28,4008 v1@3332,4008 ; v1@3809,4148 3883,4222 3883,4642 v1@3895.49,4654.49 ; v1@4296,4669 4297.6,4668.2 4300,4667 4309,4658 4366,4658 4384.5,4676.5 4384.5,4709.22 4366,4727.72 4366,4830.28 4407,4871.28 4407,4969.75 4435.25,4998 4527.37,4998 4540,5010.63 4540,5130 4539.2,5130.8 U2.13@4507.34,5130.8
  other v1: 3809,4147 3901,4660
SPI_SEL_SD: J7.2 U2.10 | length 2720.8
  Top Layer w8: J7.2@2811.02,4401.49 2884.51,4401.49 v1(2907,4379) ; v1(3593,4698) 3630,4698 3631,4697 v1@4355,4697
  Bottom Layer w8: v1(2907,4379) 2935,4351 2935,4228.37 3056.37,4107 3402.28,4107 3418.28,4123 3506,4123 3524,4141 3524,4390.28 3523.5,4390.78 3523.5,4415.22 3523,4415.72 3523,4598 3593,4668 v1@3593,4699 ; v1@4355,4697 4346,4706 4346,4954 4446,5054 4446,5053 U2.10@4493,5053
  other v1: 4346,4697
SW_BLUE: R42.1 SW4.3 U1.59 | length 1939.1
  Top Layer w8: SW4.3@4660,3044 R42.1@4720.24,2983.76 ; SW4.3@4666,3044 4716,3044 4741,3069 4741,3216 v1(4784.5,3259.5) ; R42.1@4720.47,2984 R42.1@4720.24,2983.76 ; R42.1@4721,2983 R42.1@4720.24,2983.76
  Bottom Layer w8: v1(4784.5,3259.5) 4841.5,3259.5 5063.5,3481.5 5063.5,3536.53 5111,3584.03 5111,3689.63 5224.9,3803.52 5224.9,4012.48 5207,4030.37 5207,4309.9 5117.16,4399.74 U1.59@4959.23,4399.74
SW_GREEN: R38.1 SW3.3 U1.60 | length 2934.5
  Top Layer w8: SW3.3@3910,3047 v1(3910,3093) ; SW3.3@3911,3047 3958,3047 3971.47,3033.53 R38.1@3971.47,2989 ; v1@4222,3508 4310,3508 4334,3484 4648,3484 4685,3447 v1@4685,3425
  Bottom Layer w8: v1@3909.5,3093.5 3960,3144 4171,3144 4273,3246 4273,3480 4245,3508 v1@4222,3508 ; v1@4686,3417 4975.72,3417 5047.5,3488.78 5047.5,3543.15 5095,3590.65 5095,3734 5208,3847 5208,4006.75 5191,4023.75 5191,4302 5110.16,4382.84 5011.91,4382.84 5009.12,4380.06 U1.60@4959.23,4380.06
  other v1: 4684,3427 4222,3507
SW_RED: R34.1 SW2.3 TP5.1 U1.61 | length 4186.7
  Top Layer w8: SW2.3@3154,3044 R34.1@3210.47,2987.53 ; SW2.3@3160,3044 v1(3160,3091) ; v1@3161,3092 3182,3113 v1@3296,3113 ; v1(3416,2948) 3496,2948 v1(3525,2919) ; v1@4198,2982 4206,2974 4531,2974 4521,2964 v1@4521,2975 ; v1(5046,3617) 5108,3555 5108,3240 5119,3229 v1(5119,3122) 5163,3122 TP5.1@5195,3090
  Bottom Layer w8: v1@3298,3112 3295,3109 3295,3011 3358,2948 v1(3416,2948) ; v1(3525,2919) 3526,2920 4028,2920 4091,2983 v1(4198,2983) ; v1(4521,2974) 4521,2948.14 4661.64,2807.5 4821.5,2807.5 4831,2817 4831,2902.83 4843,2914.83 4843,2915 4998.5,3070.5 5066.5,3070.5 v1@5119,3123 ; U1.61@4959.23,4360.37 5012.06,4360.37 5018.53,4366.84 5103.53,4366.84 5175,4295.37 5175,4017.12 5192,4000.12 5192,3887.75 5030,3725.75 5030,3633 v1(5046,3617)
  other v1: 3296,3112
USB_CTS: U1.22 U3.11 | length 2103
  Top Layer w8: v1(4164,3931) 4147,3914 4147,3816 4245,3718 v1(4272,3718)
  Bottom Layer w8: U3.11@4079.57,2774.45 4079.57,2823.57 4095,2839 4129.75,2839 4178,2887.25 4178,2887.37 4201.25,2910.63 4201.37,2910.63 4305,3014.25 4305,3683 4278.5,3709.5 v1@4278.5,3718.5 ; v1@4163,3930 v1(4164,3931) 4164,3994 4196,4026 4196,4298.38 4180,4314.38 4180,4389.72 4190,4399.72 4190,4466 4200,4476 4211.72,4476 4233.72,4498 4301.3,4498 4301.46,4498.17 U1.22@4362.77,4498.17
USBDM: J3.2 U3.16 | length 764.1
  Top Layer w8: v1@3635,2251 J3.2@3654.07,2340.96
  Bottom Layer w8: v1@3629,2252.97 3629,2319 3706,2396 4067.37,2396 4130.75,2459.38 U3.16@4130.75,2505.55
  other v1: 3632,2248
USBDP: J3.3 U3.15 | length 722.5
  Top Layer w8: v1@3671,2269 J3.3@3685,2335
  Bottom Layer w8: v1@3674,2262 3674,2341.37 3712.63,2380 4074,2380 4156.34,2462.34 U3.15@4156.34,2505.55
  other v1: 3677,2261
VBAT: J5.9 J6.21 R12.2 TP3.1 | length 2684.1
  Top Layer w8: TP3.1@4871,5255 4871,5129 4895,5105 4895,5059
  Top Layer w15: v1@4201,5423 4201,5328 4472,5057 4940,5057 ; 4943.67,5057 5179,5057 ; 5181.33,5057 v1@5231,5057 ; v1(5503,4741) 5503,4586 5675.5,4413.5 5675.5,4343.5 5602,4270 J5.9@5515.02,4270
  Bottom Layer w8: J6.21@4200,5350.02 v1(4200,5427) ; v1@4200.47,5435.47 R12.2@4200.47,5475
  Bottom Layer w15: v1(5238,5058) 5261,5058 5280,5039 5280,4961.82 5397.82,4844 ; 5398.67,4844 5420.67,4822 5473,4822 5503,4792 v1(5503,4741)
VDD25: C7.2 C8.2 U1.7 U1.14 U1.38 U1.62 U1.88 | length 1991.6
  Top Layer w8: v1(4449,4340) 4450,4339 4463,4339 4480,4356 4764,4356 v1(4767,4359)
  Bottom Layer w8: C7.2@4278.31,4340.69 v1@4446.69,4340.69 ; U1.7@4362.77,4202.89 4417.89,4202.89 4426,4211 4453.72,4211 ; 4454,4211 4460,4211 4485,4236 ; 4483.5,4234.5 4485,4236 ; U1.88@4661,4022.77 4661,4122.33 4636,4147.33 4636,4296.44 4661,4321.44 4661,4421 ; 4661,4464 U1.38@4661,4619.23 ; 4661.5,4463.5 4756,4369 v1@4756,4359 ; 4704,4420.5 4584.5,4420.5 4537,4373 4537,4288 4485,4236 ; v1@4756,4357 v1@4756,4359 ; v1@4765,4361 4835,4361 4855,4341 4909.09,4341 4909.41,4340.69 C8.2@5033.31,4340.69 ; v1@4773,4359 v1(4767,4359) v1@4756,4359
VDD_AUDIO: C33.1 C34.2 L5.1 U8.38 U8.43 U8.45 | length 710.6
  Bottom Layer w8: U8.45@3208.79,4733.57 3208.79,4800.79 3209.16,4800.84 ; C34.2@3248,4653.69 3248.16,4655.16 U8.43@3248.16,4733.57 3248.16,4800.84 v1@3229,4800.84 ; C33.1@3458,4682 3352,4682 3346.58,4687.42 U8.38@3346.58,4733.57 3346.58,4801.42 3309.5,4838.5 3259.5,4838.5 3229,4808 v1(3229,4806) ; C33.1@3465,4682.44 L5.1@3516.44,4682.44 ; 3209.16,4800.84 v1@3229,4800.84 ; 3209.16,4800.84 v1@3229,4800.84 ; v1@3229,4800.84 v1(3229,4806) ; v1@3229,4800.84 v1(3229,4806)
pads on no net: D10.1 D10.2 D11.1 D11.2 D12.1 D12.2 D13.1 D13.2 J1.7 J5.2 J5.15 J5.c1 J5.c2 J6.c1 J6.c2 J7. J7.1 J7.8 SW1.1 SW1.4 SW2.1 SW2.4 SW3.1 SW3.4 SW4.1 SW4.4 U1.16 U1.17 U1.37 U1.40 U1.43 U1.46 U1.51 U1.52 U1.53 U1.55 U2.15 U3.2 U3.3 U3.6 U3.8 U3.9 U3.10 U3.12 U3.13 U3.14 U3.24 U3.27 U3.28 U4.9 U5.12 U5.13 U5.28 U5.29 U6.21 U7.4 U7.5 U8.15 U8.27 U8.48
copper on no net:
  other v1: 5455,5139
  other v2: 2666.38,3829.38 2713.62,3829.38 2666.38,3876.62 2713.62,3876.62
  other v3: 2917,5201 5083,5201

## Polygon pours and split planes (outlines as drawn)
GND on Top Layer "PowerSupplyGnd" (solid, pour order 14): 4779,4899 5142,4898 5142,4616 5111,4585 4835,4585 4835,4652 4779,4708
GND on Top Layer "Top Layer-GND" (solid, pour order 13): 3115,4125 3452,4125 3452,4479 3577,4603 3576.72,4835 3048,4835 3048,4193
GND on Top Layer "Top Layer-GND" (solid, pour order 12): 3497,4852.27 3497,5367 3095,5367 3095.06,5135.81 3000,5034.5 2808,5034.5 2808,4783 3032.14,4783 3031.57,4851.92
GND on Top Layer "Top Layer-GND" (solid, pour order 11): 2514,3202 2954,3202 3058,3302 3058,4016 2373,4016 2372,3543
GND on Top Layer "Gnd" (solid, pour order 9): 3772,3170 3772,3324.56 3837,3376 3837,3640 3306,3640 3307,3639 3307,3385 3388,3385 3452,3335.63 3452,3210 3492,3170
GND on Bottom Layer "Gnd" (solid, pour order 10): 2513,3203 3058,3203 3058,3684 2680,3684 2628,3768 2628,4016 2373,4016 2373,3542 2374,3541

## Other copper
Top Layer:
  region net 3.3V: 4633.09,3339.88 4625,3334 4654.39,3293.55 4662.48,3299.43
  region net 3.3V: 4925,3304 4916.91,3309.88 4887.52,3269.43 4895.61,3263.55
  region net 3.3V: 4502.45,3083.55 4505.54,3074.04 4553.09,3089.49 4550,3099
  region net 3.3V: 4974.46,3014.04 4977.55,3023.55 4930,3039 4926.91,3029.49
  rectangle net 3.3V: 4715,2874 4725,2924
  region net 3.3V: 3133.09,3339.88 3125,3334 3154.39,3293.55 3162.48,3299.43
  region net 3.3V: 3425,3304 3416.91,3309.88 3387.52,3269.43 3395.61,3263.55
  region net 3.3V: 3474.46,3014.04 3477.55,3023.55 3430,3039 3426.91,3029.49
  region net 3.3V: 3005.45,3056.55 3008.54,3047.04 3056.09,3062.49 3053,3072
  rectangle net 3.3V: 3215,2874 3225,2924
  region net 3.3V: 3752.45,3086.55 3755.54,3077.04 3803.09,3092.49 3800,3102
  region net 3.3V: 3883.09,3342.88 3875,3337 3904.39,3296.55 3912.48,3302.43
  region net 3.3V: 4175,3307 4166.91,3312.88 4137.52,3272.43 4145.61,3266.55
  region net 3.3V: 4224.46,3017.04 4227.55,3026.55 4180,3042 4176.91,3032.49
Multi-Layer:
  lines w8: 5539,5210 5420,5210 5420,5348 ccw(c4000,4000) 2580,5348 2580,5210 2461,5210 ccw(c4000,4000) 5539.11,5209.86

## Silkscreen, mask and mechanical layers (free items; w line width, h text height)
Top Overlay:
  drawing of 2371 lines, arcs and shapes, not listed
  text "FR" at 5443,4938 h45
  text "FL" at 2491,4937 h45
  text "IR" at 4191,4056 h45
  text "Beacon" at 4192,3994 h45
  text "JTAG" at 5365,3727 h45 r335
  text "r-one-v1.11" at 5794,3438 h45 r81.85
  text "R" at 3227,3392 h90
  text "G" at 3973,3392 h90
  text "B" at 4729,3392 h90
Bottom Overlay:
  text "8962-CPU" at 4381,4603 h45
Mechanical 1:
  circle w5: c4000,4000 r1600
  lines w5: 2000,4000 6000,4000 ; 4000,2000 4000,6000
  lines w10: 2790,4449 2790,4489 ; 2818.63,4361.63 2842.24,4361.63